# Altium PCB power.PcbDoc
Units mil, origin at the board's own origin, x right, y up, seen from the top; angles counter-clockwise.
Board outline 1236 x 735 mil, 2 copper layers (Top Layer, Bottom Layer); 38 components, 28 nets, 114 pads, 70 vias.
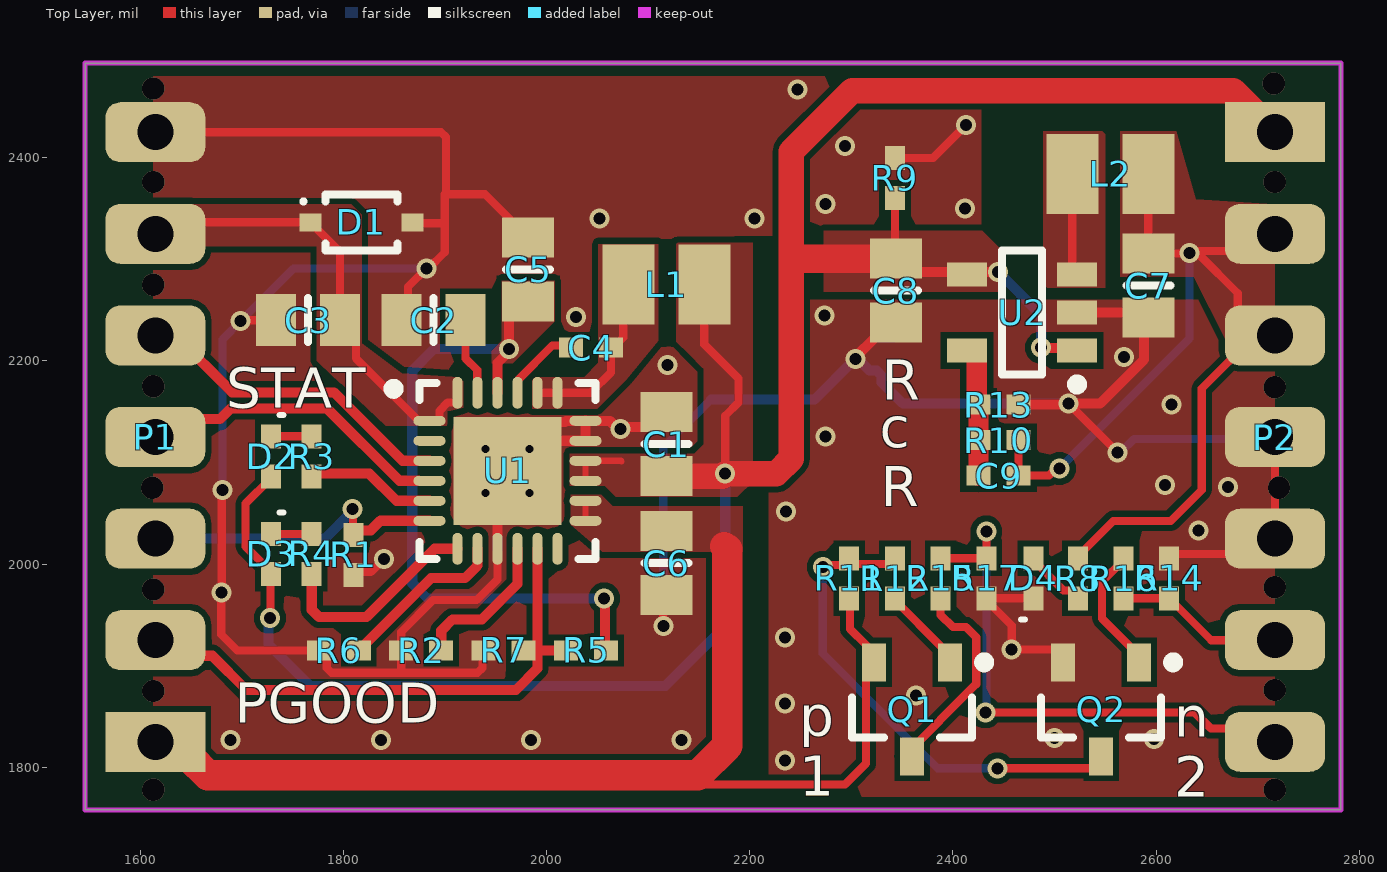
[diagram p0: Top Layer view]
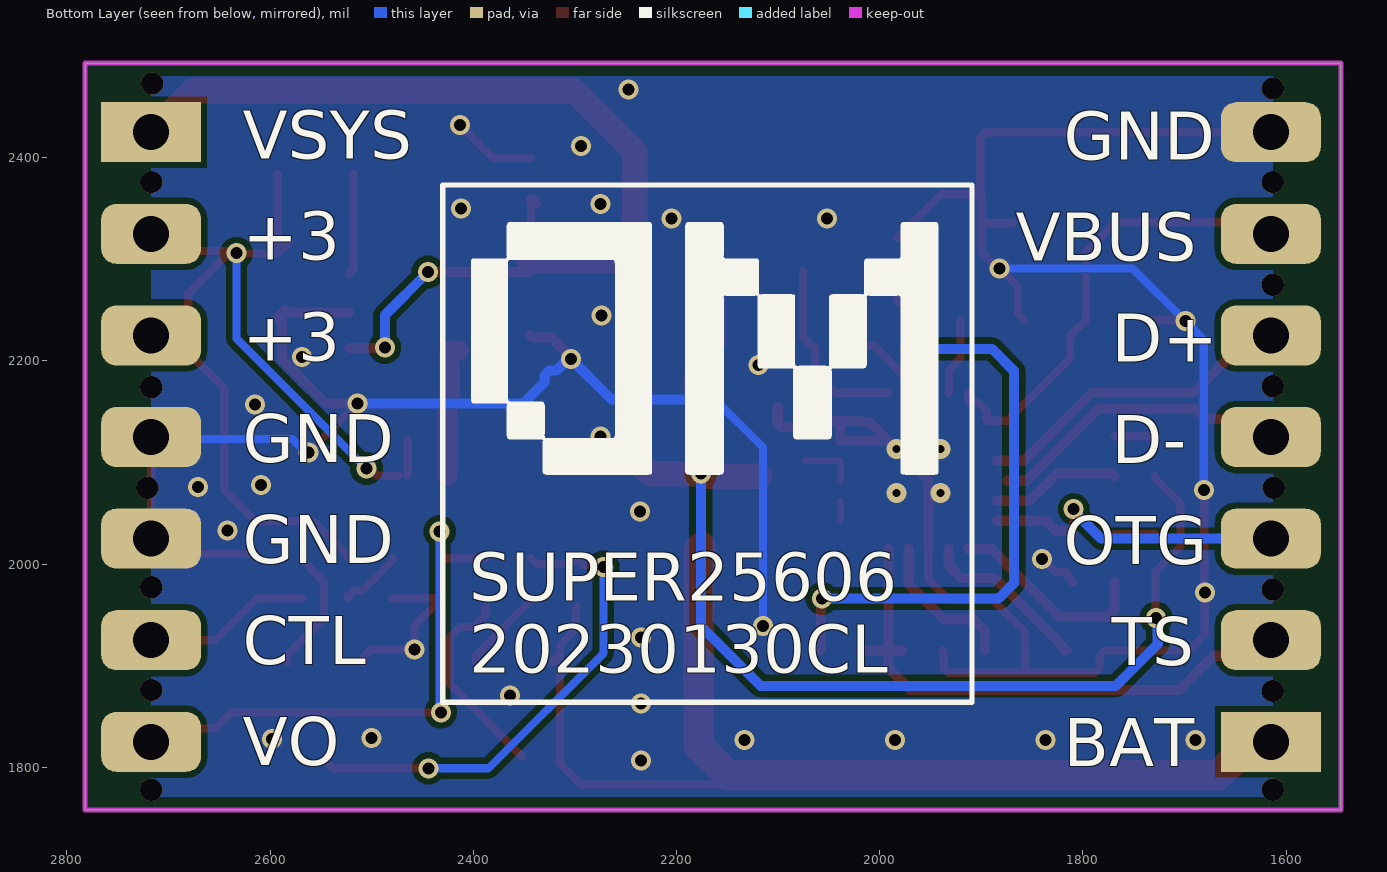
[diagram p1: Bottom Layer view, seen from below]

## Layer stack, top to bottom
Top Solder: solder mask 0.4, Solder Resist, Dk 3.5
Top Layer: signal copper 1.4
Dielectric 1: dielectric 12.6, FR-4, Dk 4.8
Bottom Layer: signal copper 1.4
Bottom Solder: solder mask 0.4, Solder Resist, Dk 3.5

## Board outline
1546,1758 1546,2493 2782,2493 2782,1758

## Design rules (kind name [scope] priority, off if disabled: settings)
Clearance [All] p1: gap=6 ignorepadtopadclearanceinfootprint=TRUE
PlaneConnect [All] p1: planeconnectstyle=Direct reliefexpansion=20 reliefentries=4 reliefconductorwidth=10 reliefairgap=10
PolygonConnect [All] p1: connectstyle=Direct reliefconductorwidth=10 reliefentries=4 polygonreliefangle="90 Angle" airgapwidth=10
RoutingVias [All] p1: holewidth=11.81 width=19.68 viastyle="Through Hole" minholewidth=11.81 minwidth=19.68 maxholewidth=67.36 maxwidth=50
SolderMaskExpansion [All] p1: expansion=4 istentingtop=FALSE
Width [All] p1: maxlimit=100 minlimit=6 preferedwidth=8
29 further rules are at their usual default settings.

## Components (designator, comment, footprint, x,y, rotation, side; value= is the part's Value field where it differs from the comment)
C1 "Cap" 6-0805_L 2118,2118 r90 top value=10uF
C2 "Cap" 6-0805_L 1889,2240 r180 top value=10uF
C3 "Cap" 6-0805_L 1765.5,2240 r0 top value=1uF
C4 "Cap" 0402 2044,2213 r0 top value=47nF
C5 "Cap" 6-0805_L 1982,2290 r90 top value=4.7uF
C6 "Cap" 6-0805_L 2118,2001 r270 top value=10uF
C7 "Cap" 6-0805_L 2592.5,2274 r90 top value=10uF
C8 "Cap" 6-0805_L 2344,2269 r90 top value=4.7uF
C9 "Cap" 0402 2445,2087 r0 top value=6.8pF
D1 "D" PESD-SOD323 1818,2336 r0 top
D2 "LED" 0402-p 1730,2102 r270 top
D3 "LED" 0402-p 1730,2006 r270 top
D4 "LED" 0402-p 2478.21,1990.09 r90 top
L1 "Inductor" L2520-INDP2520X20L 2118,2275 r0 top value=1uH
L2 "Inductor" L2520-INDP2520X20L 2555,2384 r0 top value=2.2uH
P1 "Header 7" DIP7-HOLE 1613.66,2026.57 r180 top
P2 "Header 7" DIP7-HOLE 2718.34,2223.43 r0 top
Q1 "PMOS-SI2301" SOT23-3 2360,1857 r270 top
Q2 "NMOS-SI2302" SOT23-3 2546,1857 r270 top
R1 "Res" 0402 1810,2009 r270 top value=100K
R2 "Res" 0402 1876.79,1915 r180 top value=1.6K
R3 "Res" 0402 1769,2106 r270 top value=3K
R4 "Res" 0402 1769,2010 r270 top value=3K
R5 "Res" 0402 2039,1915 r180 top value=30K
R6 "Res" 0402 1795.69,1915 r0 top value=160
R7 "Res" 0402 1957.89,1915 r180 top value=43K
R8 "Res" 0402 2523,1986 r90 top value=3K
R9 "Res" 0402 2343,2380 r270 top value=499K
R10 "Res" 0402 2445,2122 r0 top value=300K
R11 "Res" 0402 2298,1986 r270 top value=1M
R12 "Res" 0402 2343,1986 r270 top value=1K
R13 "Res" 0402 2445,2157 r180 top value=75K
R14 "Res" 0402 2613,1986 r270 top value=1M
R15 "Res" 0402 2388,1986 r270 top value=10K
R16 "Res" 0402 2568,1986 r270 top value=1K
R17 "Res" 0402 2433,1986 r90 top value=10K
U1 "BQ25606" QFN24-BQ25606 1961.77,2091.79 r0 top
U2 "TLV62569" SOT23-5 2468.13,2247.6 r180 top

## Footprints (in the part's own frame and the unit in brackets; to place one, negate y for a bottom-side part, rotate by r counter-clockwise, add the part's x,y. Pads: shape width x height; smd on the part's side, far side on the other; paste and mask are expansions set on the pad)
6-0805_L [mm] "Chip Resistor, Body 2.0x1.2mm, IPC High Density"
  rect 1x1.3 smd: 1(-0.8,0) 2(0.8,0)
  silkscreen extent 0,-0.55 0,0.55, body extent -1.07,-0.7 1.07,0.7, height 0.7
0402 [mm] "Chip Capacitor, Body 1.0x0.5mm, IPC High Density"
  rect 0.6x0.5 smd: 1(-0.5,0) 2(0.5,0)
  body extent -0.55,-0.3 0.55,0.3, height 1.3
0402-p [mm]
  rect 0.6x0.5 smd: 1(-0.604,-0.027) 2(0.396,-0.027)
  silkscreen extent -1.14,0.18 -1.14,0.28, body extent -0.65,-0.33 0.45,0.27, height 0.55
DIP7-HOLE [mm]
  rect 2.5x1.5 hole 0.9: 1(-0.034,5.12)
  rrect50% 2.5x1.5 hole 0.9: 2(-0.034,2.58) 3(-0.034,0.04) 4(-0.034,-2.5) 5(-0.034,-5.04) 6(-0.034,-7.58) 7(-0.034,-10.12)
L2520-INDP2520X20L [mm] "Precision Wire Wound Inductor, 2-Leads, Body 2.50x2.00mm, IPC High Density"
  rect 1.3x2 smd: 1(-0.95,0) 2(0.95,0)
  body extent -1.25,-1 1.25,1, height 2
PESD-SOD323 [mm]
  rect 0.55x0.45 smd: 1(-1.277,0.006) 2(1.273,0.006)
  silkscreen extent -1.5,-0.69 0.9,0.71, body extent -0.9,-0.67 0.9,0.68, height 1.1
QFN24-BQ25606 [mm] "QFN, 24-Leads, Body 4.00x4.00mm, Pitch 0.50mm, Thermal Pad 2.70x2.70mm, IPC Medium Density"
  oval 0.8x0.25 smd: 1(-1.95,1.25) 2(-1.95,0.75) 3(-1.95,0.25) 4(-1.95,-0.25) 5(-1.95,-0.75) 6(-1.95,-1.25) 13(1.95,-1.25) 14(1.95,-0.75) 15(1.95,-0.25) 16(1.95,0.25) 17(1.95,0.75) 18(1.95,1.25)
  oval 0.25x0.8 smd: 7(-1.25,-1.95) 8(-0.75,-1.95) 9(-0.25,-1.95) 10(0.25,-1.95) 11(0.75,-1.95) 12(1.25,-1.95) 19(1.25,1.95) 20(0.75,1.95) 21(0.25,1.95) 22(-0.25,1.95) 23(-0.75,1.95) 24(-1.25,1.95)
  rect 2.7x2.7 smd: 25(0,0)
  silkscreen extent -2.97,-2.2 2.2,2.2, body extent -2.05,-2.05 2.05,2.05, height 1
SOT23-3 [mm] "SOT23, 3-Leads, Body 2.90x2.45mm, Pitch 0.95mm, IPC Medium Density"
  rect 0.95x0.6 smd: 1(-1.175,0.95) 2(-1.175,-0.95) 3(1.175,0)
  silkscreen extent -1.3,-1.5 0.7,1.93, body extent -0.7,-1.5 0.7,1.5, height 1.1
SOT23-5 [mm] "SOT23, 5-Leads, Body 2.90x2.80mm, Pitch 0.95mm, IPC Medium Density"
  rect 1x0.6 smd: 1(-1.375,0.95) 2(-1.375,0) 3(-1.375,-0.95) 4(1.375,-0.95) 5(1.375,0.95)
  silkscreen extent -1.5,-1.55 0.5,1.92, body extent -0.88,-1.52 0.87,1.53, height 1.1

## Part data
C1 C2 C3 C4 C5 C6 C7 C8 C9: "Capacitor", LatestRevisionDate=17-Jul-2002, LatestRevisionNote="Re-released for DXP Platform.", PackageDescription="Radial Cap, Thru-Hole; 2 Leads; 0.3 in Pin Spacing", PackageReference=RAD-0.3, Published=8-Jun-2000, Publisher="Altium Limited"
P1 P2: "Header, 7-Pin", LatestRevisionDate=17-Jul-2002, LatestRevisionNote="Re-released for DXP Platform.", Publisher="Altium Limited"
Q1: library part PMOS
Q2: library part NMOS
R1 R2 R3 R4 R5 R6 R7 R8 R9 R10 R11 R12 R13 R14 R15 R16 R17: library part Res1, "Resistor", LatestRevisionDate=17-Jul-2002, LatestRevisionNote="Re-released for DXP Platform.", PackageDescription="Axial Device, Thru-Hole; 2 Leads; 0.3 in Pin Spacing", PackageReference=AXIAL-0.3, Published=8-Jun-2000, Publisher="Altium Limited"
L1 L2: Code_IEC=1005, Code_JEITA=0402, LatestRevisionDate=29-May-2009, LatestRevisionNote="IPC-7351 Footprint Added.", PackageDescription="Chip Inductor", PackageReference=0402-A, Published=8-Jun-2000, Publisher="Altium Limited"

## Via types
v1: diameter 19.68, hole 11.81, Top Layer to Bottom Layer, 51 vias
v2: diameter 22, hole 22, Top Layer to Bottom Layer, 15 vias
v3: diameter 19.68, hole 7.87, Top Layer to Bottom Layer, 4 vias

## Nets (pads, with @x,y where several pads share a name; then routed paths per layer and width w, separated by ;. In a path a pad name is that pad's centre, name@x,y a point inside that pad or via, vN(x,y) a via of type N, cw(c..) or ccw(c..) an arc to the next point about the centre after c; other vN are vias at no path point)
+3: C7.2 C9.2 L2.2 P2.2 P2.3 R8.2 R10.2 | length 1022
  Top Layer w8: C9.2 R10.2 ; C9.2@2473.37,2087 2494.84,2087 2501.84,2094 v1(2505,2094) ; R8.2 2523,2007.65 2528.84,2013.5 2557.88,2042.54 2614.54,2042.54 2645,2073 2645,2172.69 2697.32,2225 P2.3@2705.18,2225 ; C7.2@2580.83,2317.16 C7.2@2592.4,2305.59 ; L2.2 C7.2@2592.4,2305.59 ; P2.3 P2.3@2705.18,2225 ; P2.2 2700.24,2308.24 2635.24,2308.24 v1(2633,2306) ; C7.2@2592.4,2305.59 C7.2 2632.5,2305.5 v1(2633,2306) ; v1(2633,2306) 2635.24,2303.76 2643.24,2303.76 2680.47,2266.53 2680.47,2249.71 P2.3@2705.18,2225
  Bottom Layer w8: v1(2505,2094) 2633,2222 v1(2633,2306)
BAT: C6.1 P1.1 Q1.2 R11.2 U1.13 U1.14 | length 1156.3
  Top Layer w6: U1.13 U1.14
  Top Layer w8: 2149,1792 2158,1783 2294,1783 2314.6,1803.6 Q1.2@2314.6,1910.15 ; R11.2@2298,1958.32 2298.81,1957.51 2298.81,1936.19 2314.79,1920.21 2314.79,1911.07 Q1.2
  Top Layer w28: 2175,2017.48 2178,2014.48
  Top Layer w30: P1.1 1634.68,1825 1649.21,1810.47 1649.21,1809.57 1666.79,1792 2149,1792 2178,1821 2178,2014.48
CTL: P2.6 R14.2 R16.2 | length 166.1
  Top Layer w8: R16.2 R14.2 2654.32,1925 P2.6
D+: P1.5 U1.3 | length 321.1
  Top Layer w10: P1.5 1634.68,2225 1690.68,2169 1791,2169 1858.29,2101.71 1884.92,2101.71 U1.3
D-: P1.4 U1.4 | length 300.2
  Top Layer w10: P1.4 1632.65,2142.65 1678.65,2142.65 1689,2153 1784.37,2153 1855.35,2082.02 U1.4@1874.25,2082.02
GND: C1.2 C2.2 C3.1 C5.2 C6.2 C7.1 C8.1 D1.2 D4.1 P1.7 P2.4 P2.5 Q2.2 R1.2 R2.2 R6.1 R7.2 R9.1 R13.1 R14.1 R17.1 U1.9 U1.17 U1.18 U1.25 U2.2 | length 3709.4
  Top Layer w8: P1.7 1896.31,2425 1901,2420.31 1901,2365.09 1899.91,2364 ; v1(1681,2073) 1680.5,2072.5 1680.5,1972.5 v1(1680,1972) 1680,1930.69 1695.69,1915 R6.1 1777.97,1915 1783.81,1909.16 1783.81,1897.69 1788.5,1893 1860.41,1893 ; v1(1699,2239) 1700,2240 C3.1 ; R1.2@1810,1981.31 1810,1983 1815.84,1988.84 1815.84,1992.16 1827.16,1992.16 v1(1840,2005) ; R2.2@1855.92,1909.16 R2.2@1857.1,1910.34 ; C2.2 1863.9,2246.4 1863.9,2272.9 v1(1882,2291) 1884,2291 1899.91,2306.91 1899.91,2335.46 ; D1.2 1868.9,2335.46 1899.91,2335.46 ; R7.2 1937,1913.79 1937,1897.69 1932.31,1893 1860.41,1893 ; U1.9@1951.58,2014.66 U1.9@1951.85,2014.94 ; U1.9 1951.93,1984.97 1931.47,1964.51 1888.51,1964.51 1857.1,1933.1 R2.2 R2.2@1857.1,1910.34 ; C5.2 1939.5,2364 1899.91,2364 ; v1(2115,1939) C6.2@2115,1984.01 ; R9.1 2380.68,2399.68 v1(2413,2432) ; R17.1 R17.1@2433,1964.35 ; D4.1 2434.97,1966.32 R17.1@2433,1964.35 ; Q2.2 2508.6,1908.19 2500.79,1916 v1(2458,1916) 2458,1939.35 R17.1@2433,1964.35 ; v1(2514,2158) v1(2562,2110) ; R14.1 2617.28,2009.96 2701.96,2009.96 P2.5 P2.4 ; R2.2@1857.1,1910.34 1857.1,1896.3 1860.41,1893 ; 1899.91,2335.46 1899.91,2364
  Top Layer w10: U1.9@1951.85,2014.94 U1.9 1951.93,2081.94 U1.25 U1.25@1991.3,2121.32 ; U1.18 2038.62,2140.92 2062.46,2140.92 2070.38,2133 v1(2073,2133) 2074.81,2134.81 2097.41,2134.81 2100.31,2137.72 C1.2@2100.31,2154.32 ; v1(2304,2202) 2304,2203.41 2323.41,2222.82 2341.31,2222.82 C8.1@2344,2225.5 ; R13.1@2473.68,2156 2474.69,2157 2513,2157 v1(2514,2158) 2545,2158 2588.17,2201.17 2588.17,2239.55 C7.1@2591.81,2243.19 ; U2.2 C7.1@2587.4,2247.6 ; C7.1@2585,2250 C7.1@2587.4,2247.6 ; C7.1 C7.1@2591.81,2243.19 ; U1.25@1991.3,2121.32 2009.8,2139.81 2018.41,2139.81 2019.52,2140.92 2038.54,2140.92 U1.17 U1.25@1991.3,2121.32 ; C7.1@2587.4,2247.6 C7.1@2591.81,2243.19
  Bottom Layer w8: v1(1681,2073) 1681,2221 v1(1699,2239) 1751,2291 v1(1882,2291) ; v1(2115,1939) 2115,2115 2162,2162 ; v1(2562,2110) 2565.16,2110 2578.16,2123 2715,2123 P2.4
  Bottom Layer w10: v3@1939.06,2069.07 v3(1940.12,2070.13) ; 2162,2162 2264,2162 v1(2304,2202) 2306.62,2202 2318.27,2190.35 2325.15,2190.35 2329.86,2185.65 2329.86,2179 2350.86,2158 v1(2514,2158)
  other v1: 2234.79,1806.54 1689,1827 1837,1827 1985,1827 2133,1827 2598,1828 2500,1829 2234.79,1862.54 2363.62,1870.49 2234.79,1927.54 2642,2033 2235.79,2051.54 2671,2076 2609,2078 2274.79,2125.54 2615,2157 2119.3,2195.88 2568.43,2203.91 2029,2243 2273.79,2244.54 2052,2340 2205,2340 2412.15,2349.74 2274.79,2354.54 2293.79,2411.54 2247,2467
  other v2: 1613,1778 2717,1778 1613,1875 2717,1876 1613,1975 2717,1977 1612,2075 2721,2075 2717,2174 1613,2175 1613,2275 1613,2376 2717,2376 1613,2468 2716,2473
  other v3: 1983.43,2070.13 1940.12,2113.44 1983.43,2113.44
NetC2_1: C2.1 U1.23 | length 76.3
  Top Layer w8: C2.1 1920.5,2202.41 1931.89,2191.01 1931.89,2168.91 U1.23
NetC4_1: C4.1 U1.21 | length 72.6
  Top Layer w8: U1.21 1971.97,2168.91 1971.97,2181.16 2005.75,2214.94 2016.5,2214.94 C4.1@2017.47,2215.91
NetC4_2: C4.2 L1.1 U1.19 U1.20 | length 187.1
  Top Layer w8: U1.20 U1.19 2043.56,2168.56 2063.69,2188.69 C4.2 2065.65,2213 2075.6,2222.94 L1.1@2075.6,2289
NetC9_1: C9.1 R10.1 R13.2 U2.5 | length 133.4
  Top Layer w20: U2.5 2421.87,2210.2 2423.69,2208.39 2423.69,2157.16 2423.84,2157 R13.2 C9.1
NetD2_1: D2.1 R3.1 | length 40.1
  Top Layer w8: D2.1 1728.98,2125.73 1768.86,2125.73 1768.95,2125.64 R3.1
NetD3_1: D3.1 R4.1 | length 40.1
  Top Layer w8: D3.1 1728.98,2029.73 R4.1 R4.1
NetD4_2: D4.2 R8.1 | length 62.3
  Top Layer w8: D4.2 2479.28,2003.72 2508.87,1974.13 2517.16,1974.13 2523,1968.28 R8.1
NetL2_1: L2.1 U2.3 | length 100.9
  Top Layer w8: L2.1 2517.6,2289.67 U2.3
NetQ1_1: Q1.1 R12.2 | length 85.7
  Top Layer w8: R12.2 2343,1964.35 2389.39,1917.96 2389.59,1917.96 2397.4,1910.15 Q1.1
NetQ1_3: Q1.3 R15.2 | length 199.1
  Top Layer w8: Q1.3@2352,1810.74 2423,1881.74 2423,1928 2413,1938 2400,1938 2388,1950 R15.2@2388,1958.32
NetQ2_1: Q2.1 R16.1 | length 126.2
  Top Layer w8: R16.1 2568,2003.72 2547,1982.72 2547,1946.55 2583.4,1910.15 Q2.1
NetQ2_3: Q2.3 R11.1 R12.1 | length 492.6
  Top Layer w8: v1(2272,1997) 2274.24,1999.24 2292.16,1999.24 2293.32,2000.4 2295.29,2002.37 2298,2005.08 R11.1 2303.69,2000 2337.32,2000 R12.1 ; v1(2444,1799) 2538.19,1799 2546,1806.81 Q2.3
  Bottom Layer w8: v1(2272,1997) 2272,1912 2385,1799 v1(2444,1799)
NetR2_1: R2.1 U1.10 | length 148.1
  Top Layer w10: R2.1 1896.47,1934.47 1907.46,1945.46 1936.46,1945.46 1971.61,1980.61 U1.10
NetR3_2: R3.2 U1.5 | length 128.2
  Top Layer w10: R3.2 1771.69,2089 1825.75,2089 1852.49,2062.26 U1.5
NetR4_2: R4.2 U1.7 | length 201.5
  Top Layer w10: R4.2@1769,1982.31 1769,1955 1776,1948 1823,1948 1890.02,2015.02 U1.7
NetR6_2: R6.2 U1.8 | length 169.1
  Top Layer w10: R6.2 1817.34,1915 1822.18,1919.84 1822.18,1921.81 1886.64,1986.27 1919.98,1986.27 1932.17,1998.45 1932.17,2014.94 U1.8
OTG: P1.3 R1.1 U1.6 | length 322.4
  Top Layer w8: v1(1809,2054) 1809.5,2053.5 1809.5,2031.15 1810,2030.65 R1.1
  Top Layer w10: P1.3 P1.3@1621.16,2018.84 ; R1.1 1814.47,2033.16 1827.16,2033.16 1836.57,2042.57 U1.6
  Bottom Layer w10: P1.3 1782,2025 1809,2052 v1(1809,2054)
REGN: C5.1 R5.1 U1.22 | length 671.1
  Top Layer w10: U1.22 1951.93,2197.87 1963.22,2209.16 v1(1963.22,2211.78) 1963.22,2243.82 1977.9,2258.5 C5.1 ; C5.1@1978.09,2266.5 C5.1@1984,2266.5 ; v1(2056.85,1966.07) 2057.77,1965.16 2057.77,1915.92 R5.1
  Bottom Layer w10: v1(1963.22,2211.78) 1889.41,2211.78 1867.93,2190.3 1867.93,1981.07 1882.93,1966.07 v1(2056.85,1966.07)
TS: P1.2 R5.2 R7.1 U1.11 | length 545.2
  Top Layer w10: P1.2@1634.68,1925 1649.91,1909.78 1671.08,1909.78 1704.86,1876 1970,1876 1991.3,1897.3 1991.3,1915 ; R7.1 1991.3,1915 ; U1.11 1991.3,1915 ; R5.2 1991.3,1915
VBUS: C3.2 D1.1 P1.6 U1.1 U1.24 | length 458.1
  Top Layer w8: P1.6 1626.37,2336.37 1767.59,2336.37 D1.1 1769.69,2336.24 1774.55,2331.38 1774.55,2329.41 1796.99,2306.97 C3.2 1812.68,2224.31 1812.68,2202.5 1874.17,2141 U1.1 1893.77,2141 1894.62,2141.85 1894.62,2150.74 1902.82,2158.94 1911.71,2158.94 1912.56,2159.79 U1.24
VO: P2.7 R15.1 R17.2 | length 547.6
  Top Layer w8: R15.1 R17.2 v1(2433,2032) ; v1(2432,1854) 2638,1854 2654,1838 2704,1838 P2.7
  Bottom Layer w8: v1(2432,1854) 2431,1855 2433,1857 v1(2433,2032)
VSYS: C1.1 C8.2 D2.2 D3.2 L1.2 P2.1 R9.2 U1.15 U1.16 U2.1 U2.4 | length 2445.9
  Top Layer w6: U1.15 U1.16 2073.37,2101.63 2074,2101
  Top Layer w8: v1(1728,1947) 1728.47,1947.47 1728.47,1989.94 D3.2 1728.94,1992.38 1704,2017.31 1704,2059.5 1728.94,2084.44 D2.2 ; L1.2@2150.4,2289 L1.2@2153.99,2292.59 ; L1.2 2155.4,2216.11 2189,2182.52 2189,2159 2176,2146 v1(2176,2089) ; 2241,2292.59 2248.91,2300.5 ; R9.2 2343,2359.84 2343,2301.5 C8.2
  Top Layer w10: R9.2@2338.16,2355 R9.2@2343,2359.84 ; C8.2@2344,2288.5 2345.09,2287.4 v1(2444.6,2287.4) ; v1(2487,2213) 2487.4,2212.6 U2.1@2522.13,2212.6
  Top Layer w25: C1.1 2173.5,2086.5 v1(2176,2089) 2226.36,2089 2241,2103.64 2241,2292.59 2241,2406 2301,2466 2676,2466 P2.1
  Top Layer w28: 2248.91,2300.5 C8.2
  Bottom Layer w10: v1(1728,1947) 1726.31,1945.31 1726.31,1921.22 1767.53,1880 2117,1880 2176,1939 v1(2176,2089) ; v1(2444.6,2287.4) 2487,2245 v1(2487,2213)
pads on no net: U1.2 U1.12

## Polygon pours and split planes (outlines as drawn)
GND on Top Layer "GND_L01_P061" (solid, remove dead copper, pour order 61): 1613,2480 2185,2480 2185,1771 1613,1771
+3 on Top Layer "+3_L01_P059" (solid, remove dead copper, pour order 59): 2565,2426 2620,2426 2639,2359 2717,2354 2717,2196 2669,2220 2637,2283 2565,2283
GND on Top Layer "GND_L01_P062" (solid, pour order 62): 2175,2480 2428,2480 2428,2323 2175,2323
GND on Top Layer "GND_L01_P060" (solid, remove dead copper, pour order 60): 2218.99,2260 2717,2260 2717,1771 2218.99,1771
NetL2_1 on Top Layer "NETL2_1_L01_P057" (solid, remove dead copper, pour order 57): 2489,2426 2547,2426 2550,2423 2550,2272 2493,2272 2489,2276
VSYS on Top Layer "VSYS_L01_P056" (solid, remove dead copper, pour order 56): 2273,2328 2429,2328 2447,2310 2447,2268 2273,2268
VSYS on Top Layer "VSYS_L01_P055" (solid, remove dead copper, pour order 55): 2128,2316 2128,2219 2155,2192 2155,2118.02 2139,2102.02 2139,2072.75 2145.75,2066 2188,2066 2203,2081 2203,2216 2203,2316
NetC4_2 on Top Layer "NETC4_2_L01_P052" (solid, remove dead copper, pour order 52): 1986,2184 2037,2184 2051,2198 2051,2315 2110,2315 2110,2220 2078.5,2181.5 2050,2153 1986,2153
VBUS on Top Layer "VBUS_L01_P051" (solid, remove dead copper, pour order 51): 1640,2354 1808,2354 1818,2344 1818,2160 1774,2200.09 1774,2313 1650,2313 1647,2316
BAT on Top Layer "bat_L01_P039" (solid, remove dead copper, pour order 43): 2024,2057 2193,2057 2193,2012 2055.03,2012 2024,2038.84
VBUS on Top Layer "VBUS_L01_P019" (solid, remove dead copper, pour order 19): 1814.46,2220.24 1857.49,2187.71 1914,2184 1918,2180 1918,2154 1906,2151 1902,2136 1842,2136 1777,2197.09 1777,2230.71
VSYS on Top Layer "l" (solid, remove dead copper, pour order 44): 2023,2108.78 2145.75,2108.78 2145.75,2066 2068.33,2066 2057.33,2077 2023,2077
BAT on Top Layer "BAT_PLOGAN_100" (solid, remove dead copper, pour order 46): 2024,2047.92 2024,2068 2054,2068 2072,2050 2072,2034 2037.92,2034
REGN on Top Layer "REGN_L01_P041" (solid, remove dead copper, pour order 41): 1946,2197.87 1946,2210 1956,2220 1956,2279 2008,2279 2008,2239 1966.87,2197.87
GND on Bottom Layer "GND_L02_P050" (solid, remove dead copper, pour order 50): 1613,2480 1613,1771 2717,1771 2717,2480

## Keep-outs
Keep-Out Layer:
  the board outline again, w5

## Silkscreen, mask and mechanical layers (free items; w line width, h text height)
Top Overlay:
  text "R" at 2330.09,2161.94 h39.37
  text "STAT" at 1685,2154 h39.37
  text "c" at 2328.09,2115.09 h39.37
  text "R" at 2329.09,2056.94 h39.37
  text "PGOOD" at 1693,1844 h39.37
  text "p / 1" at 2249,1772 h39.37
  text "n / 2" at 2618,1771 h39.37
Bottom Overlay:
  drawing of 6 lines, arcs and shapes, not listed
  text "VSYS" at 2627.13,2398.87 h47.24
  text "GND" at 1818.9,2397.87 h47.24
  text "+3" at 2627.13,2299.37 h47.24
  text "VBUS" at 1866.13,2298.37 h47.24
  text "+3" at 2627.13,2199.87 h47.24
  text "D+" at 1771.67,2198.87 h47.24
  text "GND" at 2627.13,2100.37 h47.24
  text "D-" at 1771.67,2099.37 h47.24
  text "GND" at 2627.13,2000.87 h47.24
  text "OTG" at 1818.9,1999.87 h47.24
  text "CTL" at 2627.13,1901.37 h47.24
  text "TS" at 1771.67,1900.37 h47.24
  text "SUPER25606 / 20230130CL" at 2404,1893 h47.24
  text "VO" at 2627.13,1801.87 h47.24
  text "BAT" at 1818.9,1800.87 h47.24
Mechanical 1:
  lines w7.87: 1558,1771 2775,1771 2775,2480 1558,2480 1558,1771